# EAGLE board multi_board_support.job (EAGLE 6.5.0)
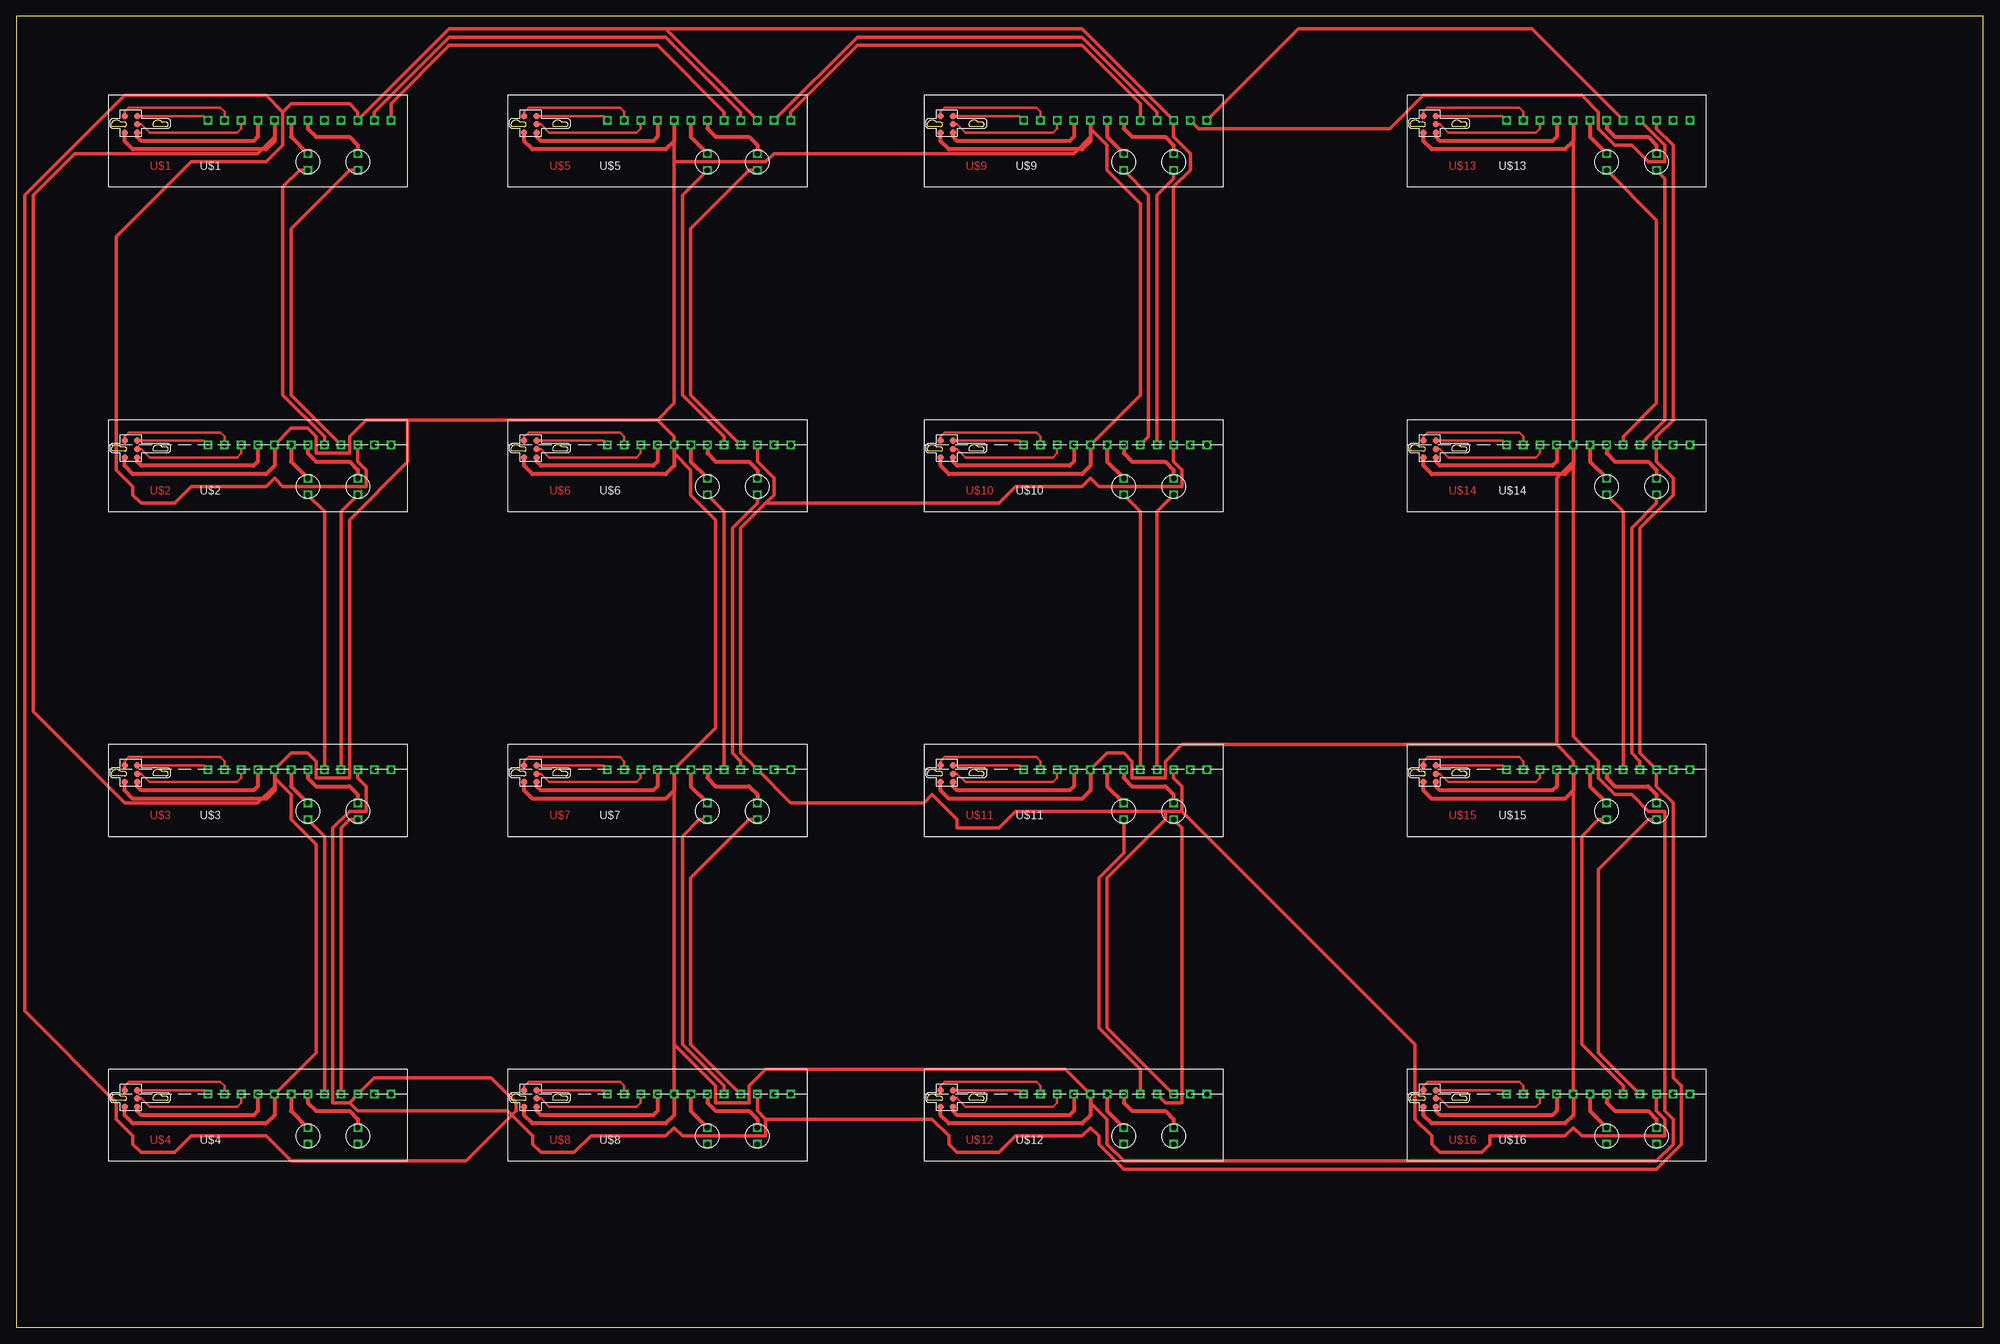
[diagram p0: board, top side]

Size 300 x 200 mm. Coordinates in mm from the lower left corner, seen from the top.
Outline: 0,0 300,0 300,200 0,200 0,0
Copper layers (1*16): Top 0.035mm / dielectric 1.5mm / Bottom 0.035mm
Design rules "default *": minimum track width 0.5mm, minimum drill 0.5mm, track to track 8mil, track to pad 8mil, pad to pad 8mil, via to via 8mil, smd to smd 8mil, copper to edge 40mil, drill to drill 8mil, minimum pad ring 10mil, minimum via ring 8mil, stop-mask expansion 4mil, vias tented up to drill 0mil, thermal gap 10mil

## Footprints (pad centres in the part's own frame; a part is rotated, then mirrored left to right if it is on the bottom)
PCB_LAY = drill 0.8 square: GND 0,0; P$9 5.08,-5.08; P$11 12.7,-5.08; PB1/MOSI/RX -7.62,0; PB2/MISO/TX -10.16,0; RESET -2.54,0; RX_BOT 12.7,-7.62; RX_BOT1 5.08,0; RX_NEXT 17.78,0; RX_TOP 7.62,0; SCK -5.08,0; TX_BOT 5.08,-7.62; TX_BOT1 2.54,0; TX_NEXT 15.24,0; TX_TOP 10.16,0; VCC 12.7,0 | smd 1 x 1: P$1 -22.86,0.635; P$2 -20.955,-0.635; P$3 -20.955,0.635; P$4 -22.86,-1.905; P$6 -20.955,-1.905

## Placement (x,y rotation side)
U$1  DEV_GRID  [PCB_LAY]  39.37,184.15 0 top
U$2  DEV_GRID  [PCB_LAY]  39.37,134.62 0 top
U$3  DEV_GRID  [PCB_LAY]  39.37,85.09 0 top
U$4  DEV_GRID  [PCB_LAY]  39.37,35.56 0 top
U$5  DEV_GRID  [PCB_LAY]  100.33,184.15 0 top
U$6  DEV_GRID  [PCB_LAY]  100.33,134.62 0 top
U$7  DEV_GRID  [PCB_LAY]  100.33,85.09 0 top
U$8  DEV_GRID  [PCB_LAY]  100.33,35.56 0 top
U$9  DEV_GRID  [PCB_LAY]  163.83,184.15 0 top
U$10  DEV_GRID  [PCB_LAY]  163.83,134.62 0 top
U$11  DEV_GRID  [PCB_LAY]  163.83,85.09 0 top
U$12  DEV_GRID  [PCB_LAY]  163.83,35.56 0 top
U$13  DEV_GRID  [PCB_LAY]  237.49,184.15 0 top
U$14  DEV_GRID  [PCB_LAY]  237.49,134.62 0 top
U$15  DEV_GRID  [PCB_LAY]  237.49,85.09 0 top
U$16  DEV_GRID  [PCB_LAY]  237.49,35.56 0 top

## Library data of the parts
U$1-U$16 = grid_component

## Nets
GND: U$1.GND U$2.GND U$3.GND U$4.GND U$5.GND U$6.GND U$7.GND U$8.GND U$9.GND U$10.GND U$11.GND U$12.GND U$13.GND U$14.GND U$15.GND U$16.GND
N$1: U$1.TX_BOT U$2.RX_TOP
N$2: U$1.RX_BOT U$2.TX_TOP
N$3: U$2.TX_BOT U$3.RX_TOP
N$4: U$2.RX_BOT U$3.TX_TOP
N$5: U$3.TX_BOT U$4.RX_TOP
N$6: U$3.RX_BOT U$4.TX_TOP
N$7: U$5.TX_BOT U$6.RX_TOP
N$8: U$5.RX_BOT U$6.TX_TOP
N$9: U$6.TX_BOT U$7.RX_TOP
N$10: U$6.RX_BOT U$7.TX_TOP
N$11: U$7.TX_BOT U$8.RX_TOP
N$12: U$7.RX_BOT U$8.TX_TOP
N$13: U$9.TX_BOT U$10.RX_TOP
N$14: U$9.RX_BOT U$10.TX_TOP
N$15: U$10.TX_BOT U$11.RX_TOP
N$16: U$10.RX_BOT U$11.TX_TOP
N$17: U$11.TX_BOT U$12.RX_TOP
N$18: U$11.RX_BOT U$12.TX_TOP
N$19: U$13.TX_BOT U$14.RX_TOP
N$20: U$13.RX_BOT U$14.TX_TOP
N$21: U$14.TX_BOT U$15.RX_TOP
N$22: U$14.RX_BOT U$15.TX_TOP
N$23: U$15.TX_BOT U$16.RX_TOP
N$24: U$15.RX_BOT U$16.TX_TOP
N$25: U$1.TX_NEXT U$5.TX_TOP
N$26: U$1.RX_NEXT U$5.RX_TOP
N$27: U$5.TX_NEXT U$9.TX_TOP
N$28: U$5.RX_NEXT U$9.RX_TOP
N$29: U$9.TX_NEXT U$13.TX_TOP
N$30: U$9.RX_NEXT U$13.RX_TOP
VCC: U$1.VCC U$2.VCC U$3.VCC U$4.VCC U$5.VCC U$6.VCC U$7.VCC U$8.VCC U$9.VCC U$10.VCC U$11.VCC U$12.VCC U$13.VCC U$14.VCC U$15.VCC U$16.VCC

## Tracks (layer width: path | path; a pad name or v marks a point on that pad's centre or on a via)
GND
  Top 0.5: U$11.GND 166.37,87.63 168.91,87.63 170.18,86.36 170.18,83.82 175.26,83.82 175.26,86.36 177.8,88.9 234.95,88.9 | 234.95,88.9 237.49,86.36 U$15.GND | U$16.GND 237.49,81.92 237.49,82.55 | 234.95,88.9 234.95,129.54 237.49,132.08 237.49,131.44 237.49,90.17 241.3,86.36 241.3,83.82 243.84,81.28 246.38,81.28 248.92,78.74 251.46,78.74 251.46,33.02 252.73,31.75 252.73,27.94 250.19,25.4 168.91,25.4 166.37,27.94 166.37,31.75 163.83,34.29 163.83,32.38 | U$14.GND 237.49,180.97 237.49,181.61 | U$4.GND 45.72,41.91 45.72,73.66 41.91,77.47 41.91,81.28 39.37,83.82 39.37,82.55 | 39.37,82.55 36.83,80.01 16.51,80.01 2.54,93.98 2.54,172.72 8.89,179.07 36.83,179.07 39.37,181.61 39.37,180.97 | 39.37,82.55 39.37,81.92 | 100.33,43.18 100.33,81.92 100.33,82.55 | 100.33,43.18 U$8.GND | U$12.GND 160.02,39.37 114.3,39.37 111.76,36.83 111.76,34.29 106.68,34.29 106.68,36.83 100.33,43.18 | U$10.GND 171.45,142.24 171.45,171.45 166.37,176.53 166.37,180.34 163.83,182.88 163.83,181.61 | U$2.GND 41.91,137.16 44.45,137.16 45.72,135.89 45.72,133.35 50.8,133.35 50.8,135.89 53.34,138.43 59.69,138.43 | 97.79,138.43 59.69,138.43 | 97.79,138.43 100.33,135.89 U$6.GND | 100.33,177.8 100.33,140.97 97.79,138.43 | 100.33,177.8 100.33,180.97 100.33,181.61 | 163.83,181.61 161.29,179.07 115.57,179.07 114.3,177.8 100.33,177.8 | 163.83,181.61 163.83,180.97 | U$7.GND 106.68,91.44 106.68,123.19 102.87,127 102.87,130.81 100.33,133.35 100.33,131.44 | U$3.GND 41.91,87.63 44.45,87.63 45.72,86.36 45.72,83.82 50.8,83.82 50.8,123.19 59.69,132.08 59.69,138.43
N$1
  Top 0.5: U$2.RX_TOP 46.99,135.89 40.64,142.24 40.64,173.99 43.18,176.53 U$1.TX_BOT
N$2
  Top 0.5: U$2.TX_TOP 41.91,142.24 41.91,167.64 50.8,176.53 U$1.RX_BOT
N$3
  Top 0.5: U$3.RX_TOP 46.99,124.46 U$2.TX_BOT
N$4
  Top 0.5: U$3.TX_TOP 49.53,124.46 U$2.RX_BOT
N$5
  Top 0.5: U$4.RX_TOP 46.99,74.93 U$3.TX_BOT
N$6
  Top 0.5: U$4.TX_TOP 49.53,76.2 50.8,77.47 U$3.RX_BOT
N$7
  Top 0.5: U$5.TX_BOT 101.6,172.72 101.6,142.24 107.95,135.89 U$6.RX_TOP
N$8
  Top 0.5: U$6.TX_TOP 102.87,142.24 102.87,167.64 111.76,176.53 U$5.RX_BOT
N$9
  Top 0.5: U$7.RX_TOP 107.95,124.46 U$6.TX_BOT
N$10
  Top 0.5: U$7.TX_TOP 110.49,86.36 109.22,87.63 109.22,121.92 113.03,125.73 U$6.RX_BOT
N$11
  Top 0.5: U$8.RX_TOP 107.95,36.83 101.6,43.18 101.6,74.93 104.14,77.47 U$7.TX_BOT
N$12
  Top 0.5: U$8.TX_TOP 102.87,43.18 102.87,68.58 111.76,77.47 U$7.RX_BOT
N$13
  Top 0.5: U$9.TX_BOT 172.72,172.72 172.72,135.89 U$10.RX_TOP
N$14
  Top 0.5: U$10.TX_TOP 173.99,172.72 176.53,175.26 U$9.RX_BOT
N$15
  Top 0.5: U$11.RX_TOP 171.45,124.46 U$10.TX_BOT
N$16
  Top 0.5: U$11.TX_TOP 173.99,124.46 U$10.RX_BOT
N$17
  Top 0.5: U$12.RX_TOP 171.45,39.37 165.1,45.72 165.1,68.58 168.91,72.39 U$11.TX_BOT
N$18
  Top 0.5: U$12.TX_TOP 175.26,34.29 177.8,34.29 177.8,76.2 U$11.RX_BOT
N$19
  Top 0.5: U$13.TX_BOT 250.19,168.91 250.19,140.97 245.11,135.89 U$14.RX_TOP
N$20
  Top 0.5: U$14.TX_TOP 251.46,138.43 251.46,175.26 U$13.RX_BOT
N$21
  Top 0.5: U$15.RX_TOP 245.11,124.46 U$14.TX_BOT
N$22
  Top 0.5: U$15.TX_TOP 247.65,86.36 246.38,87.63 246.38,121.92 250.19,125.73 U$14.RX_BOT
N$23
  Top 0.5: U$16.RX_TOP 245.11,36.83 238.76,43.18 238.76,74.93 241.3,77.47 U$15.TX_BOT
N$24
  Top 0.5: U$16.TX_TOP 241.3,41.91 241.3,69.85 248.92,77.47 U$15.RX_BOT
N$25
  Top 0.5: U$1.TX_NEXT 54.61,185.42 66.04,196.85 99.06,196.85 110.49,185.42 U$5.TX_TOP
N$26
  Top 0.5: U$1.RX_NEXT 57.15,186.69 66.04,195.58 97.79,195.58 107.95,185.42 U$5.RX_TOP
N$27
  Top 0.5: U$5.TX_NEXT 128.27,196.85 162.56,196.85 173.99,185.42 U$9.TX_TOP
N$28
  Top 0.5: U$5.RX_NEXT 118.11,185.42 128.27,195.58 162.56,195.58 171.45,186.69 U$9.RX_TOP
N$29
  Top 0.5: U$9.TX_NEXT 180.34,182.88 209.55,182.88 214.63,187.96 238.76,187.96 241.3,185.42 241.3,182.88 243.84,180.34 246.38,180.34 248.92,177.8 251.46,177.8 251.46,180.34 U$13.TX_TOP
N$30
  Top 0.5: U$9.RX_NEXT 195.58,198.12 231.14,198.12 U$13.RX_TOP
VCC
  Top 0.5: U$13.VCC 250.19,182.88 252.73,180.34 252.73,138.43 250.19,135.89 U$14.VCC 250.19,132.08 252.73,129.54 252.73,127 247.65,121.92 247.65,87.63 U$15.VCC 250.19,82.55 252.73,80.01 252.73,38.1 254,36.83 254,27.94 250.19,24.13 168.91,24.13 165.1,27.94 165.1,29.21 163.83,30.48 162.56,29.21 152.4,29.21 149.86,26.67 143.51,26.67 142.24,27.94 142.24,29.21 139.7,31.75 114.3,31.75 | 50.8,34.29 U$4.VCC 54.61,38.1 72.39,38.1 76.2,34.29 76.2,33.02 68.58,25.4 41.91,25.4 38.1,29.21 26.67,29.21 24.13,26.67 19.05,26.67 17.78,27.94 17.78,29.21 15.24,31.75 15.24,34.29 1.27,48.26 1.27,172.72 16.51,187.96 38.1,187.96 40.64,185.42 | 50.8,34.29 48.26,34.29 48.26,76.2 50.8,78.74 53.34,78.74 53.34,82.55 52.07,83.82 U$3.VCC | U$8.VCC 113.03,33.02 114.3,31.75 | 114.3,31.75 114.3,29.21 101.6,29.21 100.33,30.48 99.06,29.21 87.63,29.21 85.09,26.67 80.01,26.67 78.74,27.94 78.74,29.21 74.93,33.02 52.07,33.02 50.8,34.29 | U$2.VCC 52.07,132.08 53.34,130.81 53.34,128.27 40.64,128.27 39.37,129.54 38.1,128.27 26.67,128.27 24.13,125.73 19.05,125.73 17.78,127 17.78,128.27 15.24,130.81 15.24,166.37 26.67,177.8 38.1,177.8 40.64,180.34 40.64,185.42 | 40.64,185.42 41.91,186.69 50.8,186.69 52.07,185.42 U$1.VCC 66.04,198.12 99.06,198.12 | 99.06,198.12 U$5.VCC | 99.06,198.12 162.56,198.12 U$9.VCC 176.53,181.61 179.07,179.07 179.07,176.53 176.53,173.99 U$10.VCC 176.53,132.08 177.8,130.81 177.8,128.27 165.1,128.27 163.83,129.54 162.56,128.27 152.4,128.27 149.86,125.73 114.3,125.73 | 114.3,125.73 115.57,127 115.57,129.54 113.03,132.08 U$6.VCC | 114.3,125.73 110.49,121.92 110.49,87.63 U$7.VCC 118.11,80.01 138.43,80.01 139.7,81.28 143.51,77.47 143.51,76.2 149.86,76.2 152.4,78.74 175.26,78.74
  Top 0.5: U$12.VCC 166.37,45.72 166.37,68.58 175.26,77.47 175.26,78.74 | 177.8,78.74 175.26,78.74 | 177.8,78.74 177.8,82.55 176.53,83.82 U$11.VCC | U$16.VCC 250.19,33.02 251.46,31.75 251.46,29.21 238.76,29.21 237.49,30.48 236.22,29.21 224.79,29.21 224.79,27.94 223.52,26.67 217.17,26.67 215.9,27.94 215.9,29.21 213.36,31.75 213.36,43.18 177.8,78.74